# Altium PCB RC Reciever PcbDoc.PcbDoc
Units mil, origin at the board's own origin, x right, y up, seen from the top; angles counter-clockwise.
Board outline 1500 x 2160 mil, 2 copper layers (Top Layer, Bottom Layer); 20 components, 30 nets, 116 pads, 4 vias.
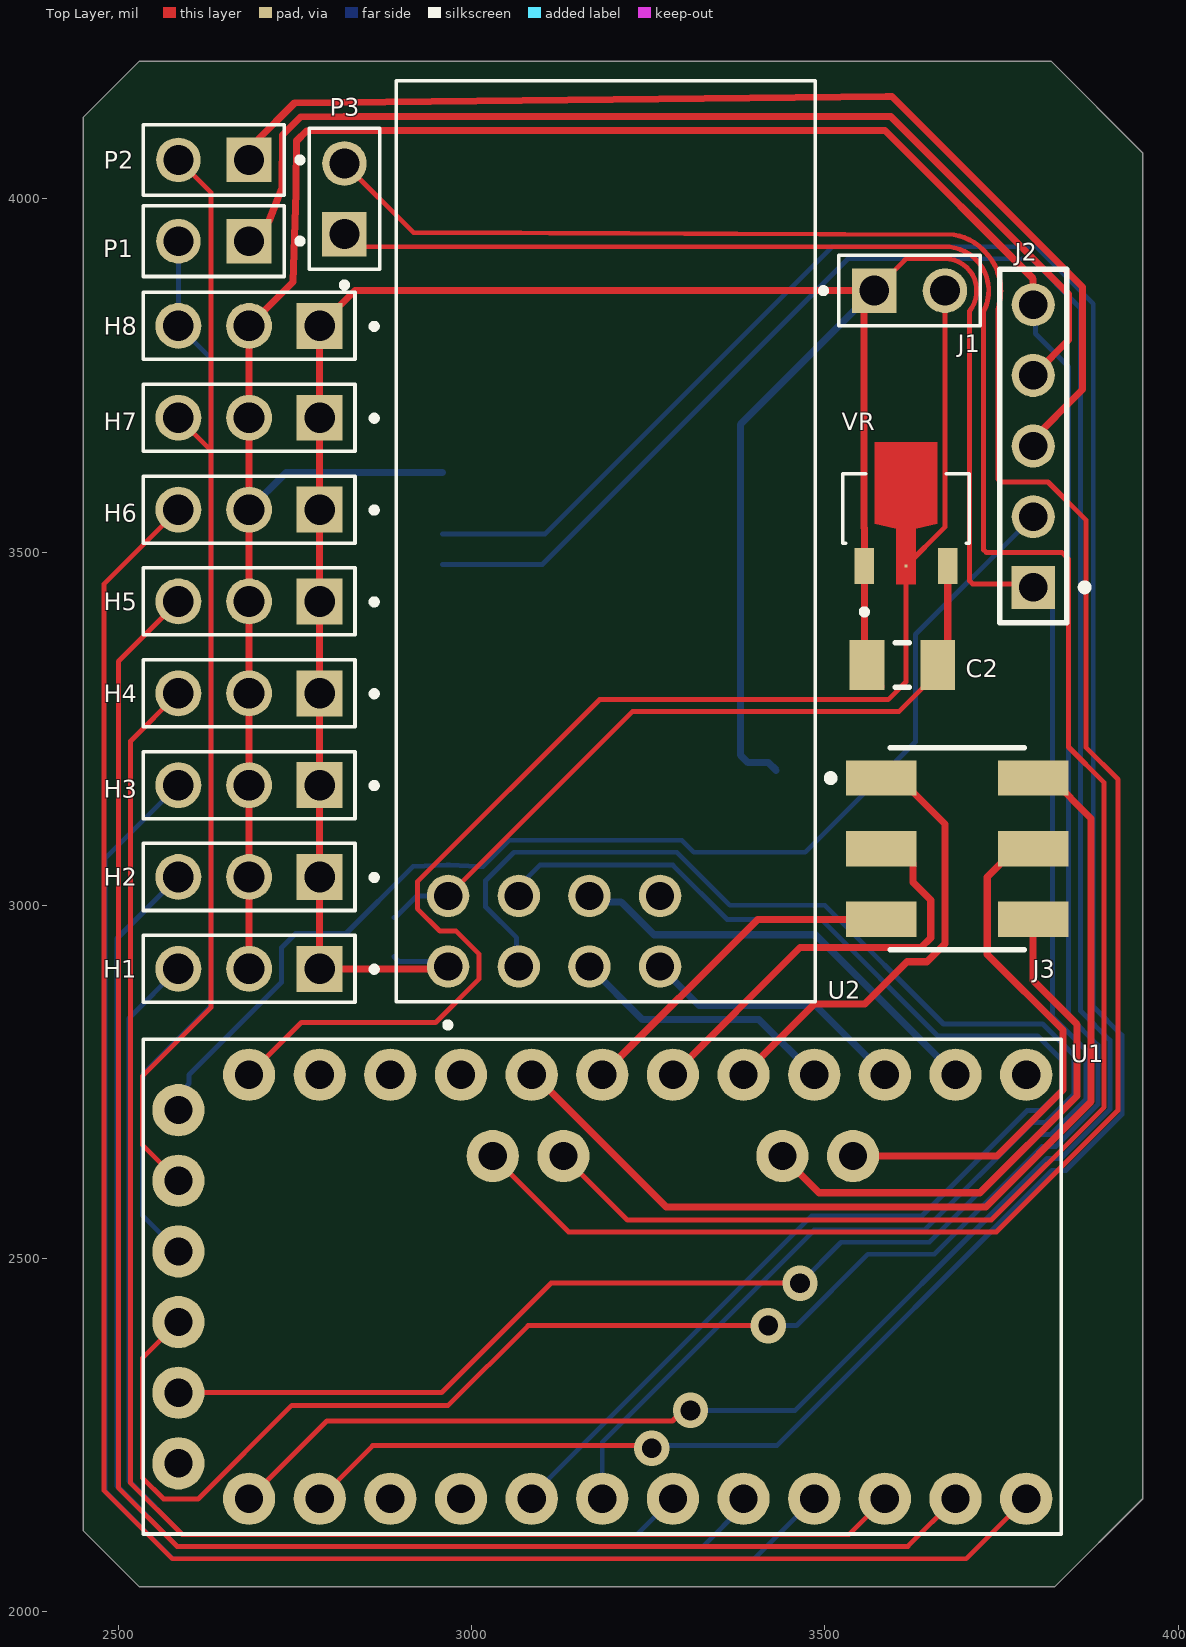
[diagram p0: Top Layer view]
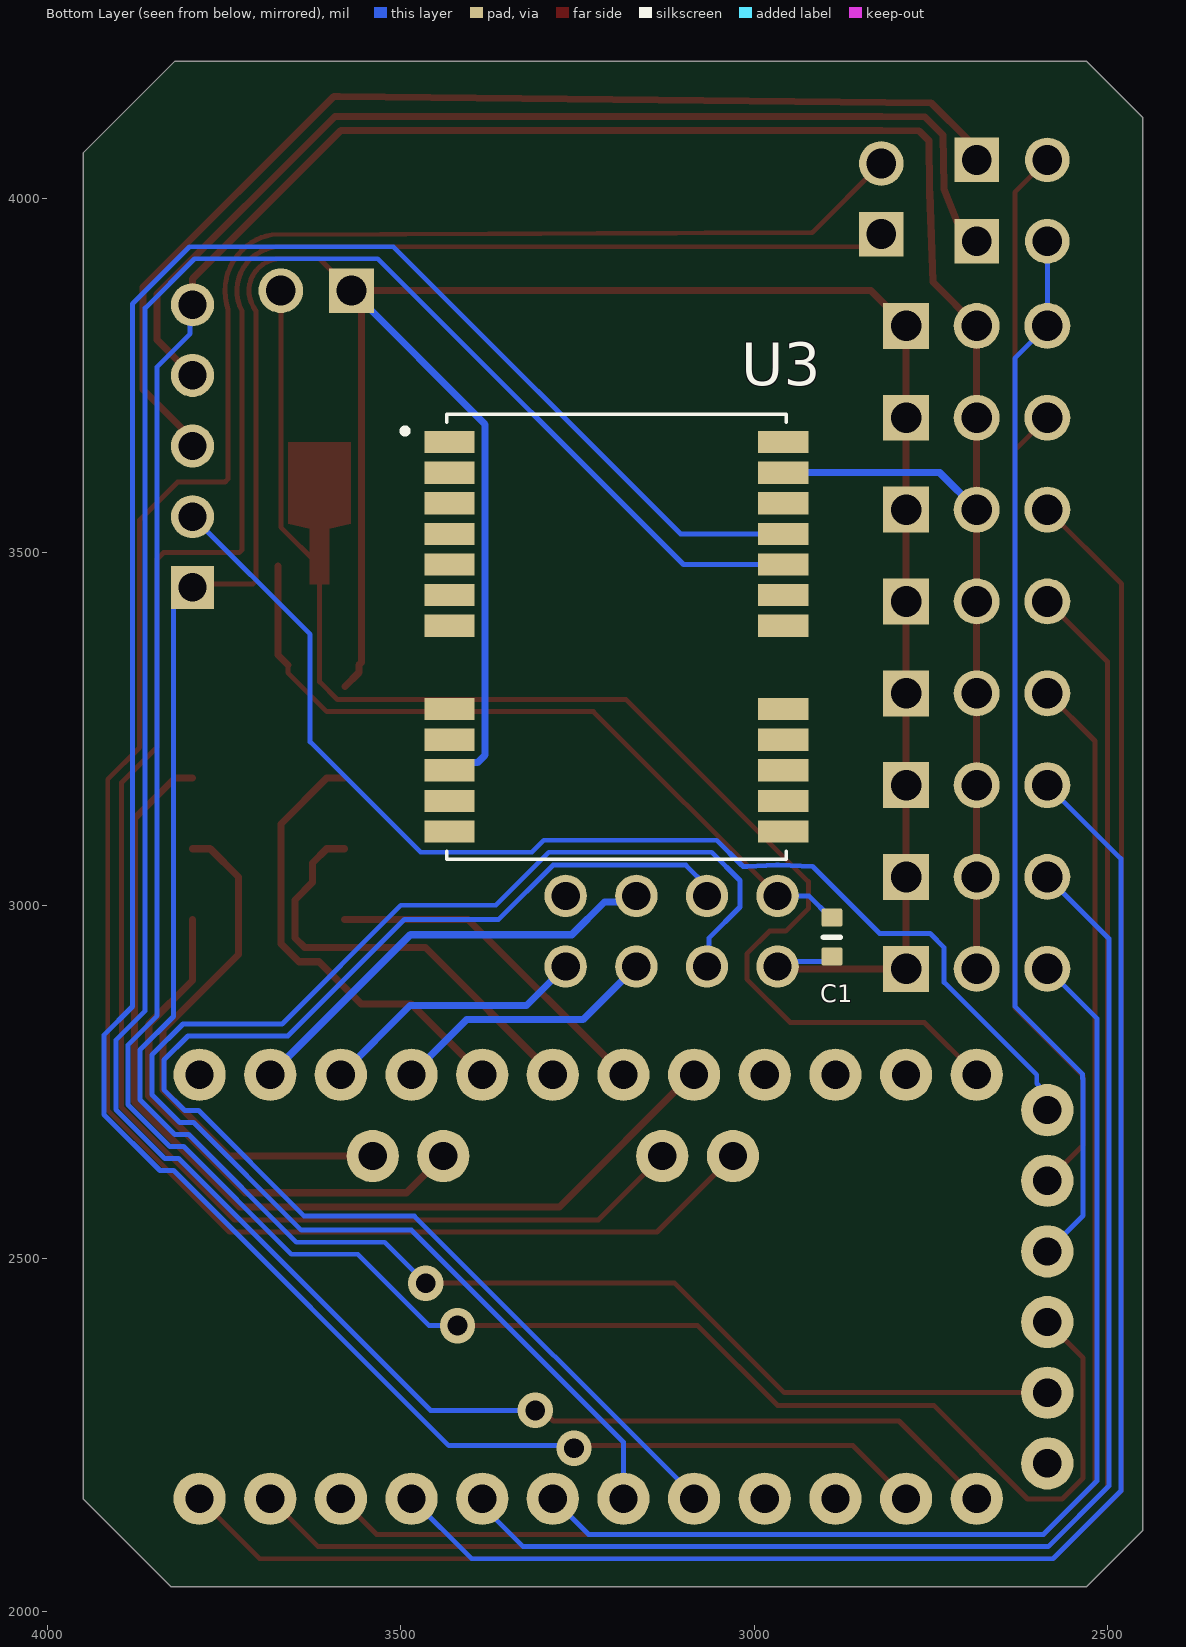
[diagram p1: Bottom Layer view, seen from below]

## Layer stack, top to bottom
Top Solder: solder mask 0.4, Solder Resist, Dk 3.5
Top Layer: signal copper 1.4
Dielectric 1: dielectric 12.6, FR-4, Dk 4.8
Bottom Layer: signal copper 1.4
Bottom Solder: solder mask 0.4, Solder Resist, Dk 3.5

## Board outline
2450,2115 2450,4115 2530,4195 3820,4195 3950,4065 3950,2160 3825,2035 2530,2035

## Design rules (kind name [scope] priority, off if disabled: settings)
Clearance [All] p1: gap=10 ignorepadtopadclearanceinfootprint=FALSE
MinimumSolderMaskSliver [All] p1: minsoldermaskwidth=3
PolygonConnect [All] p1: connectstyle=Relief reliefconductorwidth=10 reliefentries=4 polygonreliefangle="90 Angle" airgapwidth=10
RoutingVias [All] p1: holewidth=28 width=50 viastyle="Through Hole" minholewidth=28 minwidth=50 maxholewidth=28 maxwidth=50
SilkToSilkClearance [All] p1: silktosilkclearance=6
SolderMaskExpansion [All] p1: expansion=4 istentingtop=FALSE
SupplyNets "Schematic Supply Nets" [InNet('GND')] p1: voltage=0.000
Width [All] p1: maxlimit=10 minlimit=7 preferedwidth=7
28 further rules are at their usual default settings.

## Classes and differential pairs
component class "RC Reciever Backend": U3

## Components (designator, comment, footprint, x,y, rotation, side; value= is the part's Value field where it differs from the comment)
C1 "Capacitor 10µF +/-20% 10V 0603" CAPC0603(1608)100_L 2890,2955 r270 bottom value=10µF
C2 "Capacitor 100 uF +/- 20% 6.3 V 1206" CAPC3216X190X55LL30T25 3609.8,3340 r180 top value=100µF
H1 "10129378-903004BLF" AMPHENOL_10129378-903004BLF 2685,2910 r180 top
H2 "10129378-903004BLF" AMPHENOL_10129378-903004BLF 2685,3040 r180 top
H3 "10129378-903004BLF" AMPHENOL_10129378-903004BLF 2685,3170 r180 top
H4 "10129378-903004BLF" AMPHENOL_10129378-903004BLF 2685,3300 r180 top
H5 "10129378-903004BLF" AMPHENOL_10129378-903004BLF 2685,3430 r180 top
H6 "10129378-903004BLF" AMPHENOL_10129378-903004BLF 2685,3560 r180 top
H7 "10129378-903004BLF" AMPHENOL_10129378-903004BLF 2685,3690 r180 top
H8 "10129378-903004BLF" AMPHENOL_10129378-903004BLF 2685,3820 r180 top
J1 "M20-9990246" HARWIN_M20-9990246 3620,3870 r0 top
J2 "77311-462K05LF" FCI-77311-5_V 3795,3650 r90 top
J3 "95278-101A06LF" AMPM-95278-101A06LF_V 3687.48,3080 r270 top
P1 "M20-9990246" HARWIN_M20-9990246 2635,3940 r180 top
P2 "M20-9990246" HARWIN_M20-9990246 2635,4055 r180 top
P3 "P3" HARWIN_M20-9990246 2820,4000 r90 top
U1 "ARDUINO_PRO_MINI" MODULE_ARDUINO_PRO_MINI 3185,2460 r90 top
U2 "NRF24L01P-MODULE-PCB" XCVR_NRF24L01P-MODULE-PCB 3190,3515 r90 top
U3 "NEO-6M-GPS" XCVR_NEO-6M-GPS 3195,3380 r180 bottom
VR "HT7333" IC_HT7333 3615,3555 r0 top

## Footprints (in the part's own frame and the unit in brackets; to place one, negate y for a bottom-side part, rotate by r counter-clockwise, add the part's x,y. Pads: shape width x height; smd on the part's side, far side on the other; paste and mask are expansions set on the pad)
AMPHENOL_10129378-903004BLF [mm]
  rect 1.65x1.65 / inner round 1.65 / far side rect 1.65x1.65 hole 1.1: 1(-2.54,0)
  round 1.65 hole 1.1: 2(0,0) 3(2.54,0)
  silkscreen extent -4.6,-1.2 3.81,1.2
AMPM-95278-101A06LF_V [mm] "SMD, 6-Leads, Body 7.26x4.83mm, Pitch 2.54mm"
  rect 1.27x2.54 smd: 1(-2.54,-2.73) 2(-2.54,2.73) 3(0,-2.73) 4(0,2.73) 5(2.54,-2.73) 6(2.54,2.73)
  silkscreen extent -3.63,-4.67 3.63,2.41, body extent -3.61,-3.64 3.61,3.64, height 9.71
CAPC0603(1608)100_L [mm] "Chip Capacitor, Body 1.6x0.8mm, Height 1.0mm, IPC High Density"
  rrect25% 0.66x0.76 smd: 1(-0.7,0) 2(0.7,0)
  silkscreen extent 0,-0.3 0,0.3, body extent -0.8,-0.4 0.8,0.4, height 0.95
CAPC3216X190X55LL30T25 [mm] "Chip Capacitor, 2-Leads, Body 3.5x1.9mm, IPC High Density"
  rect 1.25x1.8 smd: 1(-1.275,0) 2(1.275,0)
  silkscreen extent -0.25,-0.8 0.25,0.8, body extent -1.75,-0.95 1.75,0.95, height 1.9
FCI-77311-5_V [mm] "THD, 5-Leads, Body 12.7x2.4mm, Pitch 2.54mm"
  rect 1.55x1.55 hole 1.02: 1(-5.08,0)
  round 1.55 hole 1.02: 2(-2.54,0) 3(0,0) 4(2.54,0) 5(5.08,0)
  silkscreen extent -6.35,-1.97 6.35,1.2, body extent -6.35,-1.2 6.35,1.2, height 16.24
HARWIN_M20-9990246 [mm]
  rect 1.605x1.605 / inner round 1.605 / far side rect 1.605x1.605 hole 1.07: 1(-1.27,0)
  round 1.605 hole 1.07: 2(1.27,0)
  silkscreen extent -3.2,-1.27 2.54,1.27, body extent -2.54,-1.27 2.54,1.27, height 8.74
IC_HT7333 [mm]
  rect 0.7x1.3 smd: 1(-1.5,-1.9) 3(1.5,-1.9)
  rect 0.1x0.1 smd paste-1 mask+0: 2(0,-1.9)
  Top Layer region: 1.125,-0.375 0.35,-0.56 0.35,-2.55 -0.35,-2.55 -0.35,-0.56 -1.125,-0.375 -1.125,2.55 1.125,2.55
  silkscreen extent -2.27,-3.65 2.27,1.41, body extent -2.25,-1.88 2.25,2.21, height 1.6
MODULE_ARDUINO_PRO_MINI [mil]
  round 74 hole 40: JP1_1(250,600) JP1_2(150,600) JP1_3(50,600) JP1_4(-50,600) JP1_5(-150,600) JP1_6(-250,600) JP2_1(185,55) JP2_2(185,155) JP3_1(185,-355) JP3_2(185,-255) JP6_1(300,500) JP6_2(300,400) JP6_3(300,300) JP6_4(300,200) JP6_5(300,100) JP6_6(300,0) JP6_7(300,-100) JP6_8(300,-200) JP6_9(300,-300) JP6_10(300,-400) JP6_11(300,-500) JP6_12(300,-600) JP7_1(-300,-600) JP7_2(-300,-500) JP7_3(-300,-400) JP7_4(-300,-300) JP7_5(-300,-200) JP7_6(-300,-100) JP7_7(-300,0) JP7_8(-300,100) JP7_9(-300,200) JP7_10(-300,300) JP7_11(-300,400) JP7_12(-300,500)
  silkscreen extent -350,-650 350,650, body extent -350,-650 350,650, height 133
XCVR_NEO-6M-GPS [mm]
  rect 1.8x0.8 smd paste-2: 1(-6,7) 2(-6,5.9) 3(-6,4.8) 4(-6,3.7) 5(-6,2.6) 6(-6,1.5) 7(-6,0.4) 8(-6,-2.6) 9(-6,-3.7) 10(-6,-4.8) 11(-6,-5.9) 12(-6,-7) 13(6,-7) 14(6,-5.9) 15(6,-4.8) 16(6,-3.7) 17(6,-2.6) 18(6,0.4) 19(6,1.5) 20(6,2.6) 21(6,3.7) 22(6,4.8) 23(6,5.9) 24(6,7)
  silkscreen extent -7.7,-8 6.1,8, body extent -6.1,-8 6.1,8, height 2.6
XCVR_NRF24L01P-MODULE-PCB [mil]
  round 60 hole 40: 1(-601.75,223.18) 2(-501.75,223.18) 3(-601.75,123.18) 4(-501.75,123.18) 5(-601.75,23.18) 6(-501.75,23.18) 7(-601.75,-76.82) 8(-501.75,-76.82)
  silkscreen extent -688,-297 652,297

## Part data
C1: library part CMP-001-00075-4, "Chip Capacitor, 10µF +/-20%, 10V, 0603, Thickness 1 mm", Case/Package=0603, Max Operating Temperature=85°C, Min Operating Temperature=-55°C, Tolerance=10%, Voltage Rating=10V, Mounting Technology=SMT, Pins=2
C2: library part CMP-001-00019-6, "Chip Capacitor, 100 uF, +/- 20%, 6.3 V, 1206 (3216 Metric)", Capacitor Type=Ceramic, Case/Package=1206, Max Operating Temperature=85°C, Min Operating Temperature=-55°C, Tolerance=20%, Voltage Rating=6.3V, Mounting Technology=SM, Pins=2, RoHS Compliant=True
H1 H2 H3 H4 H5 H6 H7 H8: Package=None, Availability=Unavailable, MF="{'manufacturer': u'Amphenol ICC (FCI)'}", MP=10129378-903004BLF, Price=None
J1 P1 P2: "2.54mm (0.1) Pitch SIL Vertical Throughboard Pin Header, 6.1mm mating pin height, tin, 2 contacts", Package=None, Check_prices=https://www.snapeda.com/parts/M20-9990246/Harwin/view-part/?ref=eda, MF=Harwin, MP=M20-9990246, SnapEDA_Link=https://www.snapeda.com/parts/M20-9990246/Harwin/view-part/?ref=snap
J2: library part CMP-002-00021-2, "Male Header, Pitch 2.54 mm, 1 x 5 Position, Height 16.24 mm, Tail Length 3.05 mm, -65 to 125 degC, RoHS, Tape and Reel", Case/Package=77311-5, Manufacturer="FCI Electronics", Package Description="Male Header, Pitch 2.54 mm, 1 x 5 Position, Height 16.24 mm, Tail Length 3.05 mm", Connector Type=Header, Datasheet URL=http://portal.fciconnect.com/Comergent//fci/drawing/77311.pdf, Datasheet Version="Rev. CK, 07/2016", Gender=Male, Manufacturer URL=http://portal.fciconnect.com/, Mounting Technology=TH, Package Reference=77311-5, RoHS Compliant=Unknown
J3: library part CMP-002-00024-2, "Male Header, Pitch 2.54 mm, 2 x 3 Position, Height 14.4 mm, RoHS, Tape and Reel", Manufacturer=Amphenol, Package Description="Male Header, Pitch 2.54 mm, 2 x 3 Position, Height 14.4 mm", Case/Package=95278-101A06LF, Connector Type=Header, Datasheet URL=http://portal.fciconnect.com/Comergent//fci/drawing/95278.pdf, Datasheet Version="Rev. AC, 03/2016", Gender=Male, Mounting Technology=SM, Package Reference=95278-101A06LF, RoHS Compliant=Unknown
P3: library part M20-9990246, "2.54mm (0.1) Pitch SIL Vertical Throughboard Pin Header, 6.1mm mating pin height, tin, 2 contacts", Package=None, Check_prices=https://www.snapeda.com/parts/M20-9990246/Harwin/view-part/?ref=eda, MF=Harwin, MP=M20-9990246, SnapEDA_Link=https://www.snapeda.com/parts/M20-9990246/Harwin/view-part/?ref=snap
U1: "This board was developed for applications and installations where space is premium and projects are made as permanent set ups. Small, available in 3.3 V and 5 V versions, powered by ATmega328P.", Package=None, Check_prices=https://www.snapeda.com/parts/Arduino%20Pro%20Mini/Arduino/view-part/?ref=eda, MF=Arduino, MP="Arduino Pro Mini", SnapEDA_Link=https://www.snapeda.com/parts/Arduino%20Pro%20Mini/Arduino/view-part/?ref=snap
U2: "- Transceiver For Use With nRF24L01+", Package=None, Availability=Bad, MF="Nordic Semiconductor", Mouser-Purchase-URL=https://snapeda.com/shop?store=Mouser&id=230534, MP=NRF24L01P-MODULE-PCB, Price=None, SnapEDA_Link=https://www.snapeda.com/parts/NRF24L01P-MODULE-PCB/Nordic%20Semiconductor%20ASA/view-part/230534/?ref=snap
U3: "GPS Development Tools SparkFun GNSS-RTK Dead Reckoning Breakout - ZED-F9K (Qwiic)", Package=None, Availability="Not in stock", Check_prices=https://www.snapeda.com/parts/NEO-6M-GPS/u-blox/view-part/?ref=eda, MF=u-blox, MP=NEO-6M-GPS, Price=None, SnapEDA_Link=https://www.snapeda.com/parts/NEO-6M-GPS/u-blox/view-part/?ref=snap
VR: "Three-terminal, low power, high voltage regulator implemented in CMOS technology", Package=None, Check_prices=https://www.snapeda.com/parts/HT7333/Holtek/view-part/?ref=eda, MF="Holtek Semiconductor", MP=HT7333, SnapEDA_Link=https://www.snapeda.com/parts/HT7333/Holtek/view-part/?ref=snap

## Via types
v1: diameter 50, hole 28, Top Layer to Bottom Layer, 4 vias

## Nets (pads, with @x,y where several pads share a name; then routed paths per layer and width w, separated by ;. In a path a pad name is that pad's centre, name@x,y a point inside that pad or via, vN(x,y) a via of type N, cw(c..) or ccw(c..) an arc to the next point about the centre after c; other vN are vias at no path point)
A0: J3.1 U1.JP6_8 | length 648.3
  Top Layer w10: U1.JP6_8 3485.52,2860.52 3556.73,2860.52 3616.21,2920 3644.5,2920 3670,2945.5 3670,3115 3605,3180 J3.1
A1: J3.3 U1.JP6_7 | length 615.1
  Top Layer w10: U1.JP6_7 3465,2940 3636.21,2940 3650,2953.79 3650,3007.5 3625,3032.5 3625,3060 3605,3080 J3.3
A2: J3.5 U1.JP6_6 | length 486.1
  Top Layer w10: U1.JP6_6 3405,2980 J3.5
A3: J3.2 U1.JP6_5 | length 1437.9
  Top Layer w10: U1.JP6_5 3088.54,2760 3275.54,2573 3728.11,2573 3877,2721.89 3877,3122.96 3819.96,3180 J3.2
A6: J3.4 U1.JP3_1 | length 763.2
  Top Layer w10: U1.JP3_1 3743.54,2645 3837,2738.46 3837,2823.21 3729.96,2930.25 3729.96,3040 3769.96,3080 J3.4
A7: J3.6 U1.JP3_2 | length 770.9
  Top Layer w10: U1.JP3_2 3492,2593 3719.82,2593 3857,2730.18 3857,2831.49 3794.96,2893.53 J3.6
CE: U1.JP7_7 U2.3 | length 2116.3
  Bottom Layer w7: U2.3 3063.77,2916.3 3063.77,2953.75 3020,2997.52 3020,3035 3060,3075 3290.62,3075 3365.62,3000 3500,3000 3668,2832 3808.46,2832 3852.5,2787.96 3852.5,2732.04 3812.96,2692.5 3793.46,2692.5 3640.96,2540 3485,2540 3185,2240 U1.JP7_7
CH1: H1.3 U1.JP7_6 | length 1576.2
  Bottom Layer w7: H1.3 2515,2840 2515,2185 2590.5,2109.5 3234.5,2109.5 U1.JP7_6
CH2: H2.3 U1.JP7_5 | length 1854.7
  Bottom Layer w7: H2.3 2498,2953 2498,2177.96 2583.96,2092 3327,2092 3385,2150 U1.JP7_5
CH3: H3.3 U1.JP7_4 | length 2121.1
  Bottom Layer w7: H3.3 2481,3066 2481,2170.92 2576.92,2075 3400,2075 U1.JP7_4
CH4: H4.3 U1.JP7_3 | length 2264.4
  Top Layer w7: H4.3 2517.5,3232.5 2517.5,2182.04 2590.04,2109.5 3534.5,2109.5 U1.JP7_3
CH5: H5.3 U1.JP7_2 | length 2537
  Top Layer w7: H5.3 2500,3345 2500,2175.5 2583,2092.5 3617.5,2092.5 U1.JP7_2
CH6: H6.3 U1.JP7_1 | length 2812.2
  Top Layer w7: H6.3 2480,3455 2480,2171.46 2576.46,2075 3700,2075 U1.JP7_1
CH7: H7.3 P2.2 U1.JP1_2 | length 1590
  Top Layer w7: U1.JP1_2 2534.5,2660.5 2534.5,2758.52 2630.98,2855 2630.98,3644.02 ; H7.3 2630.98,3644.02 ; P2.2 2630.98,4009.02 2630.98,3644.02
CH8: H8.3 P1.2 U1.JP1_3 | length 1509.9
  Bottom Layer w7: U1.JP1_3 2534.5,2560.5 2534.5,2754.5 2535,2755 2535,2760.94 2630.98,2856.92 2630.98,3774.02 H8.3 P1.2
CSN: U1.JP7_8 U2.4 | length 1943.5
  Bottom Layer w7: U2.4 3066.82,3026.82 3096.75,3056.75 3284.83,3056.75 3361.58,2980 3495,2980 3660,2815 3801.42,2815 3835.5,2780.92 3835.5,2739.08 3805.92,2709.5 3786.42,2709.5 3636.92,2560 3480.96,2560 3085,2164.04 U1.JP7_8
DTR: J2.2 U1.JP1_1 | length 1710.4
  Bottom Layer w7: U1.JP1_1 2597.82,2722.82 2597.82,2745.42 2600,2747.6 2600,2759.97 2730.98,2890.95 2730.98,2940.03 2750.95,2960 2822.29,2960 2915.24,3052.95 2917.29,3055 2965.18,3056.72 cw(c2966.82,3013.25) 2968.6,3056.71 3010.16,3055 3015.96,3055 3018.01,3057.05 3052.96,3092 3297.66,3092 3314.66,3075 3472.08,3075 3628.45,3231.37 3628.45,3383.45 J2.2
GND: C1.2 C2.2 H1.1 H2.1 H3.1 H4.1 H5.1 H6.1 H7.1 H8.1 J1.1 J2.1 U1.JP1_5 U2.1 U3.10 VR.1 | length 6258.1
  Top Layer w7: U1.JP1_5 2957.38,2310 3112.38,2465 v1(3465,2465) ; J1.1 3613.04,3913.04 3615.09,3915.09 3670,3915.09 cw(c3670,3870) 3708.37,3846.31 3706.06,3842.56 3705.02,3840.87 3705.02,3838.89 3705.02,3459.1 3709.12,3455 J2.1@3795,3455
  Top Layer w10: U2.1@2966.82,2910 H1.1 H2.1 H3.1 H4.1 H5.1 H6.1 H7.1 H8.1 2835,3870 J1.1 3555.71,3855.71 3555.71,3534.02 3555.94,3533.79 VR.1 3555.94,3343.66 C2.2 3559.61,3329.17 C2.2@3579.21,3309.57
  Bottom Layer w7: C1.2 2897.09,2920.35 2959.72,2920.35 U2.1 ; v1(3465,2465) 3523,2523 3648,2523 3800.5,2675.5 3820,2675.5 3869.5,2725 3869.5,2795 3822.01,2842.49 3822.01,3422.99 J2.1
  Bottom Layer w10: U3.10 3420.47,3201.77 3391.39,3201.77 3380.79,3212.37 3380.79,3680.79 J1.1
MISO: U1.JP6_10 U2.7 | length 381.7
  Bottom Layer w10: U2.7 3322.1,2857.97 3487.03,2857.97 U1.JP6_10
MOSI: U1.JP6_11 U2.6 | length 623.1
  Bottom Layer w10: U2.6 3175.45,3004.61 3211.82,3004.61 3258.17,2958.25 3486.75,2958.25 U1.JP6_11
NetC1_1: C1.1 C2.1 U2.2 VR.3 | length 1070.4
  Top Layer w7: U2.2 3227.63,3274.07 3604.89,3274.07 3660,3329.17 C2.1
  Top Layer w10: C2.1 3674.06,3354.06 VR.3
  Bottom Layer w7: C1.1 2891.96,2982.56 2922.65,3013.25 U2.2
NetJ1_2: J1.2 U1.JP6_1 VR.2 | length 1954.4
  Top Layer w7: U1.JP6_1 2759.03,2834.03 2949.11,2834.03 3010.32,2895.23 3010.32,2931.27 2978.34,2963.25 2955.29,2963.25 2923.32,2995.23 2923.32,3033.32 3181.07,3291.07 3589.8,3291.07 3615,3316.26 VR.2 3670,3535.2 J1.2
NetU1_JP7_11: U1.JP7_11 U3.21 | length 3650.9
  Top Layer w7: U1.JP7_11 2860,2235 3251.5,2235 v1(3255,2231.5)
  Bottom Layer w7: U3.21 3104.24,3525.67 3510.66,3932.09 3799.19,3932.09 3880,3851.28 3880,2856.63 3920.5,2816.13 3920.5,2703.87 3841.13,2624.5 3821.62,2624.5 3432.12,2235 3258.5,2235 v1(3255,2231.5)
NetU1_JP7_12: U1.JP7_12 U3.20 | length 3709.6
  Top Layer w7: U1.JP7_12 2795,2270 3284.4,2270 3299.4,2285 v1(3310,2285)
  Bottom Layer w7: U3.20 3100.08,3482.36 3532.81,3915.09 3792.15,3915.09 3862,3845.24 3862,2850.58 3903.5,2809.08 3903.5,2710.92 3834.08,2641.5 3814.58,2641.5 3458.08,2285 v1(3310,2285)
RX1: J2.4 P1.1 | length 1521.6
  Top Layer w10: P1.1 2713.27,3968.27 2731.56,4014.55 2731.58,4016.39 2732.48,4090.41 2758,4115.92 2819.3,4116.59 3593.41,4116.59 3845,3865 3845,3800 J2.4@3800,3755
SCK: U1.JP6_9 U2.5 | length 381.7
  Bottom Layer w10: U2.5 3242.1,2837.97 3407.03,2837.97 U1.JP6_9
SCL: P3.2 U1.JP2_2 | length 3286.5
  Top Layer w7: P3.2 2917.95,3952.05 3682.85,3949.1 cw(c3670.88,3875.5) 3724.32,3927.5 3724.9,3926.94 cw(c3670,3870) 3746.8,3851.08 3745,3843.77 3745,3603.11 3749.1,3599.01 3815.99,3599.01 3870,3545 3870,3223.09 3915,3178.09 3915,2709.69 3742.81,2537.5 3137.5,2537.5 U1.JP2_2
SDA: P3.1 U1.JP2_1 | length 3112.3
  Top Layer w7: P3.1 2848.09,3932.09 3676.63,3932.09 3683.12,3930.69 cw(c3670,3870) 3724.85,3840.89 3724.85,3503.11 3726.9,3501.06 3728.95,3499.01 3835.99,3499.01 3845,3490 3845,3224.05 3895.5,3173.55 3895.5,2714.23 3735.77,2554.5 3220.5,2554.5 U1.JP2_1
TX0: J2.3 P2.1 | length 1583.6
  Top Layer w10: P2.1 2695.38,4081.59 2749.62,4135.83 3586.77,4145 3595,4145 3597.93,4142.07 3865,3875 3865,3730 J2.3@3790,3655
VCC: H1.2 H2.2 H3.2 H4.2 H5.2 H6.2 H7.2 H8.2 J2.5 U1.JP1_4 U3.23 | length 5672.6
  Top Layer w7: U1.JP1_4 2534.5,2359.5 2534.5,2189.08 2564.08,2159.5 2613.08,2159.5 2745.58,2292 2967,2292 3080,2405 v1(3420,2405)
  Top Layer w10: H1.2 H2.2 H3.2 H4.2 H5.2 H6.2 H7.2 H8.2 2747.07,3882.07 2751.49,4008.81 2751.59,4013.38 2752.48,4082.13 2766.37,4096.01 2819.41,4096.59 3585.12,4096.59 3588.05,4093.67 3795,3886.72 J2.5
  Bottom Layer w7: v1(3420,2405) 3460,2405 3561,2506 3655.04,2506 3807.54,2658.5 3827.04,2658.5 3886.5,2717.96 3886.5,2802.04 3845,2843.54 3845,3762.24 3798.25,3808.99 3798.25,3846.75 J2.5
  Bottom Layer w10: H6.2 2737.28,3612.28 U3.23
pads on no net: U1.JP1_6 U1.JP6_2 U1.JP6_3 U1.JP6_4 U1.JP6_12 U1.JP7_9 U1.JP7_10 U2.8 U3.1 U3.2 U3.3 U3.4 U3.5 U3.6 U3.7 U3.8 U3.9 U3.11 U3.12 U3.13 U3.14 U3.15 U3.16 U3.17 U3.18 U3.19 U3.22 U3.24

## Silkscreen, mask and mechanical layers (free items; w line width, h text height)
Mechanical 1:
  lines w10: 2530,4195 2450,4115 2450,2210 2450,2115 2530,2035 3825,2035 3950,2160 3950,4065 3820,4195 2535,4195